# Altium PCB seeeduino nano.PcbDoc
Units mil, origin at the board's own origin, x right, y up, seen from the top; angles counter-clockwise.
Board outline 700 x 1700 mil, 6 copper layers (Top, Route2, Route3, Route14, Route15, Bottom), stack 20.956 mil thick; 53 components, 52 nets, 213 pads, 74 vias.
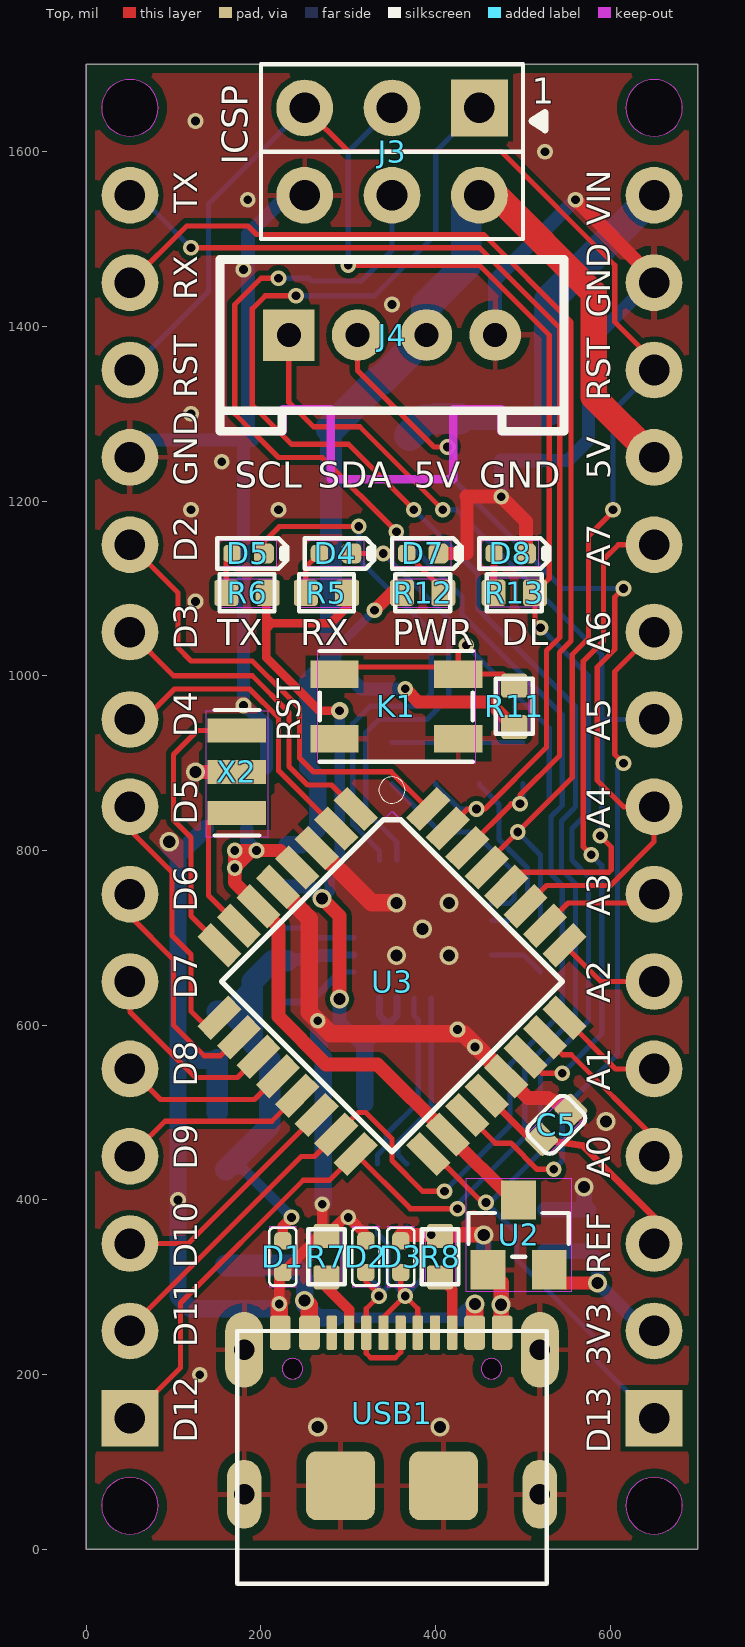
[diagram p0: Top view]
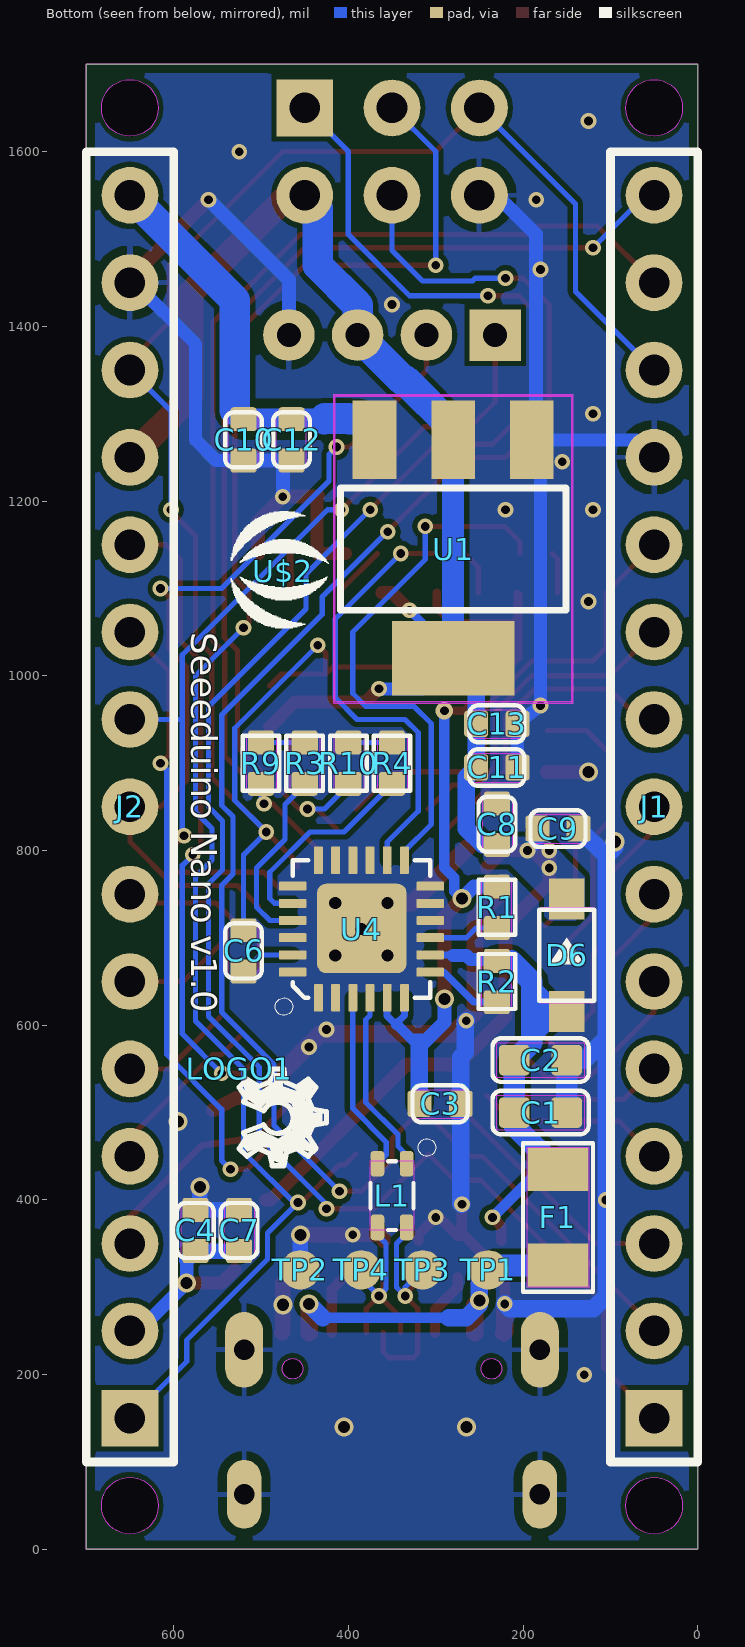
[diagram p1: Bottom view, seen from below]
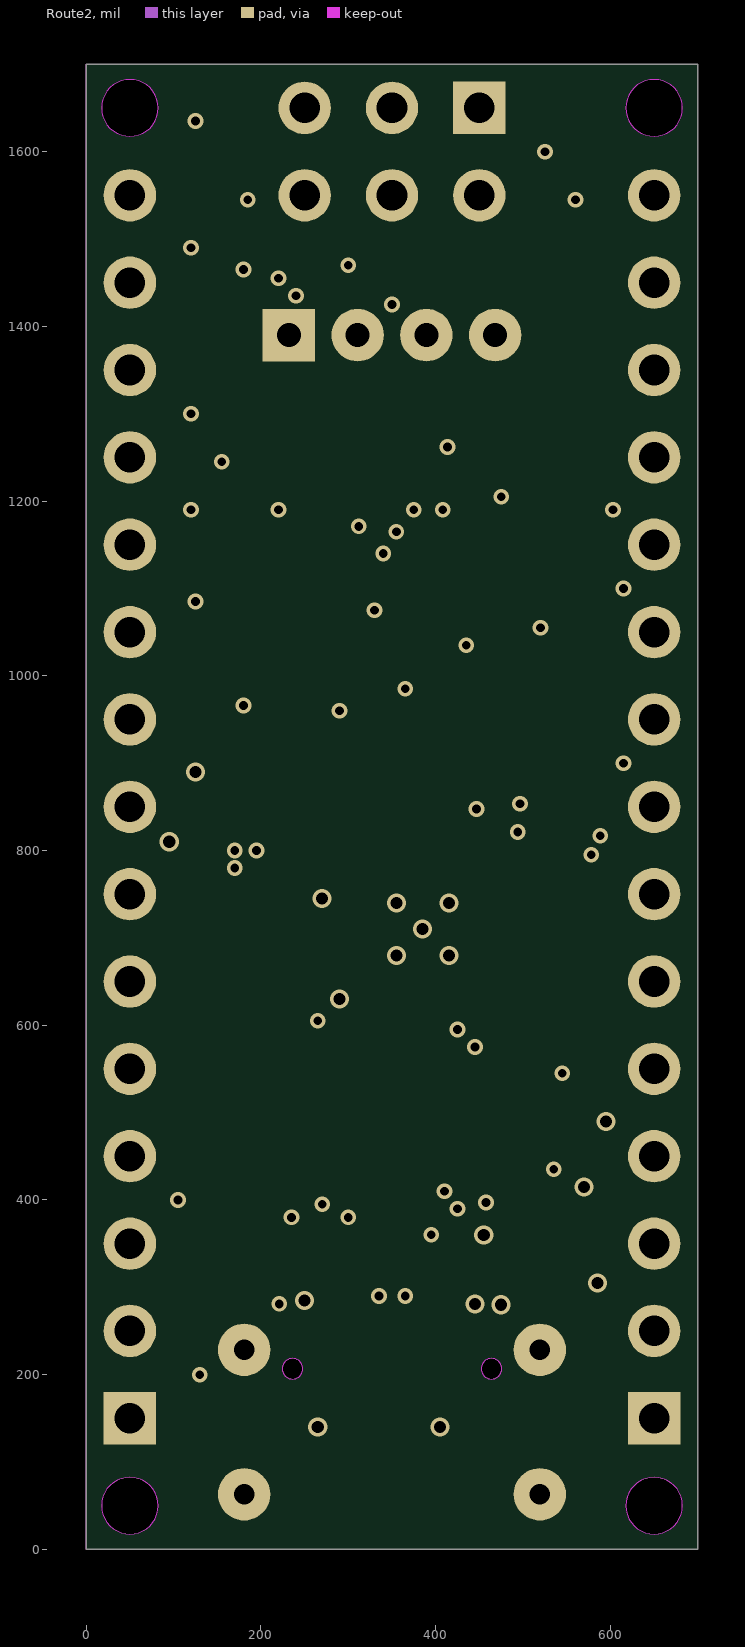
[diagram p2: Route2]
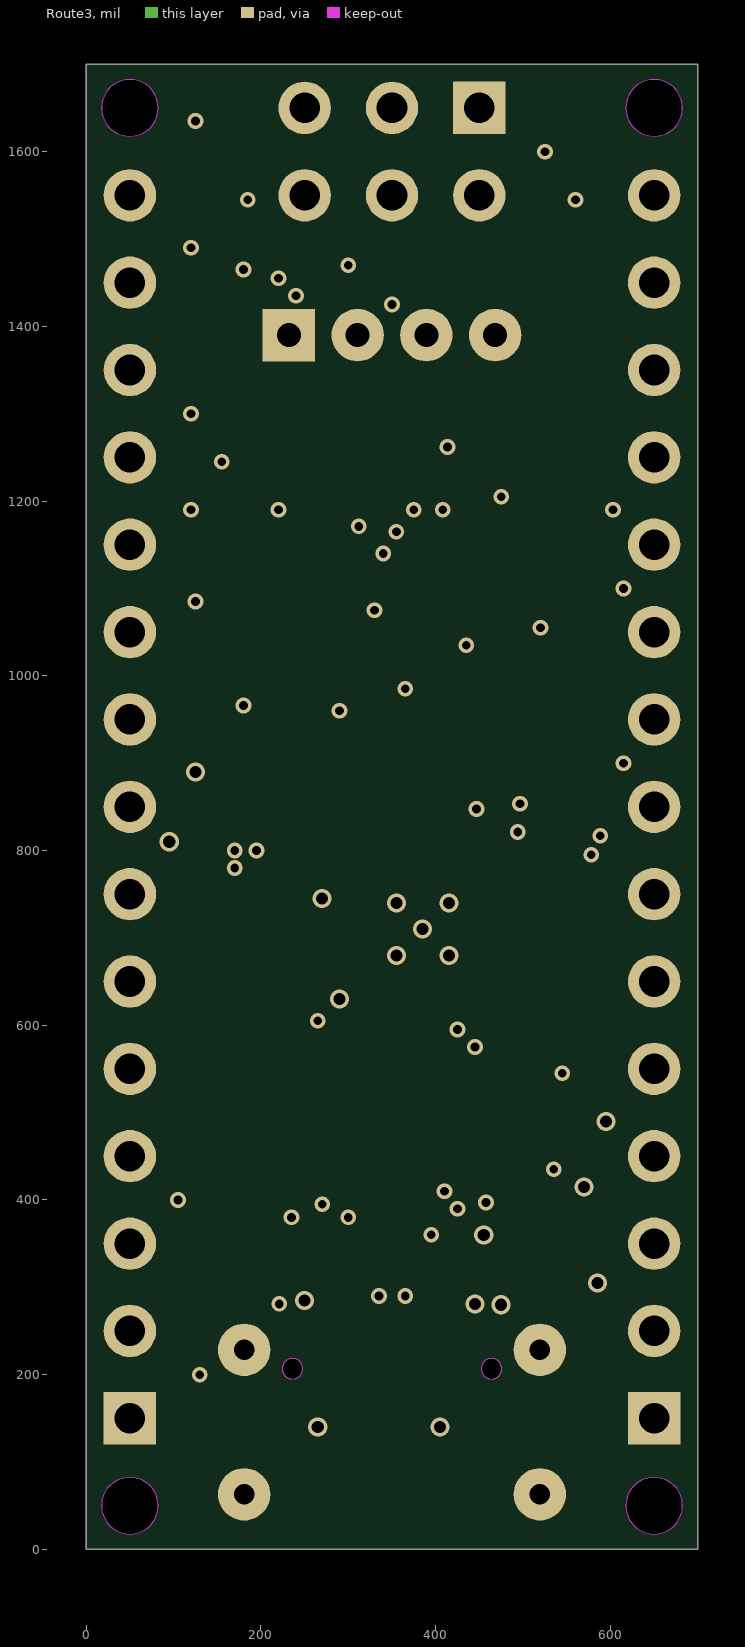
[diagram p3: Route3]
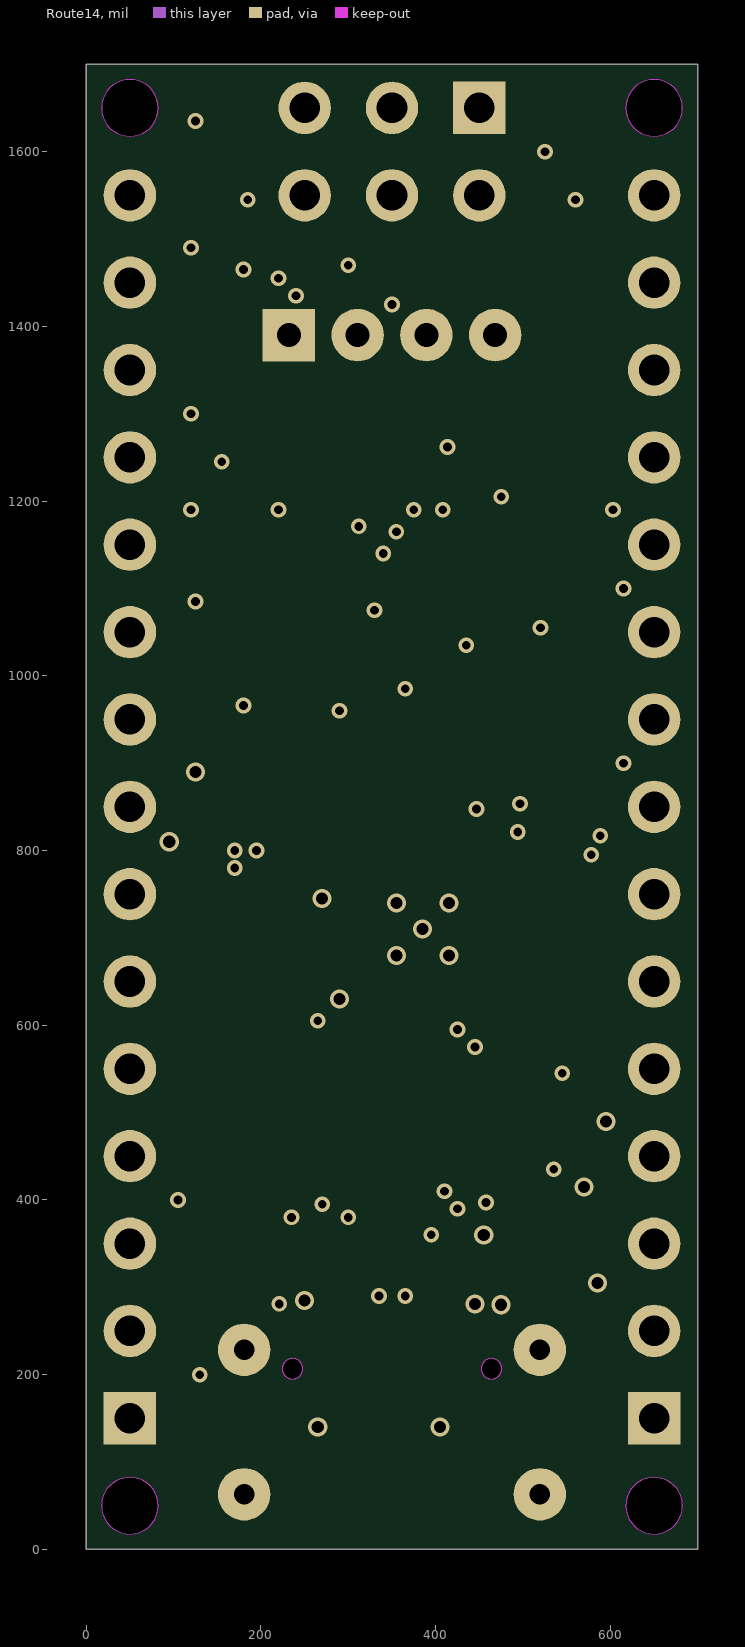
[diagram p4: Route14]
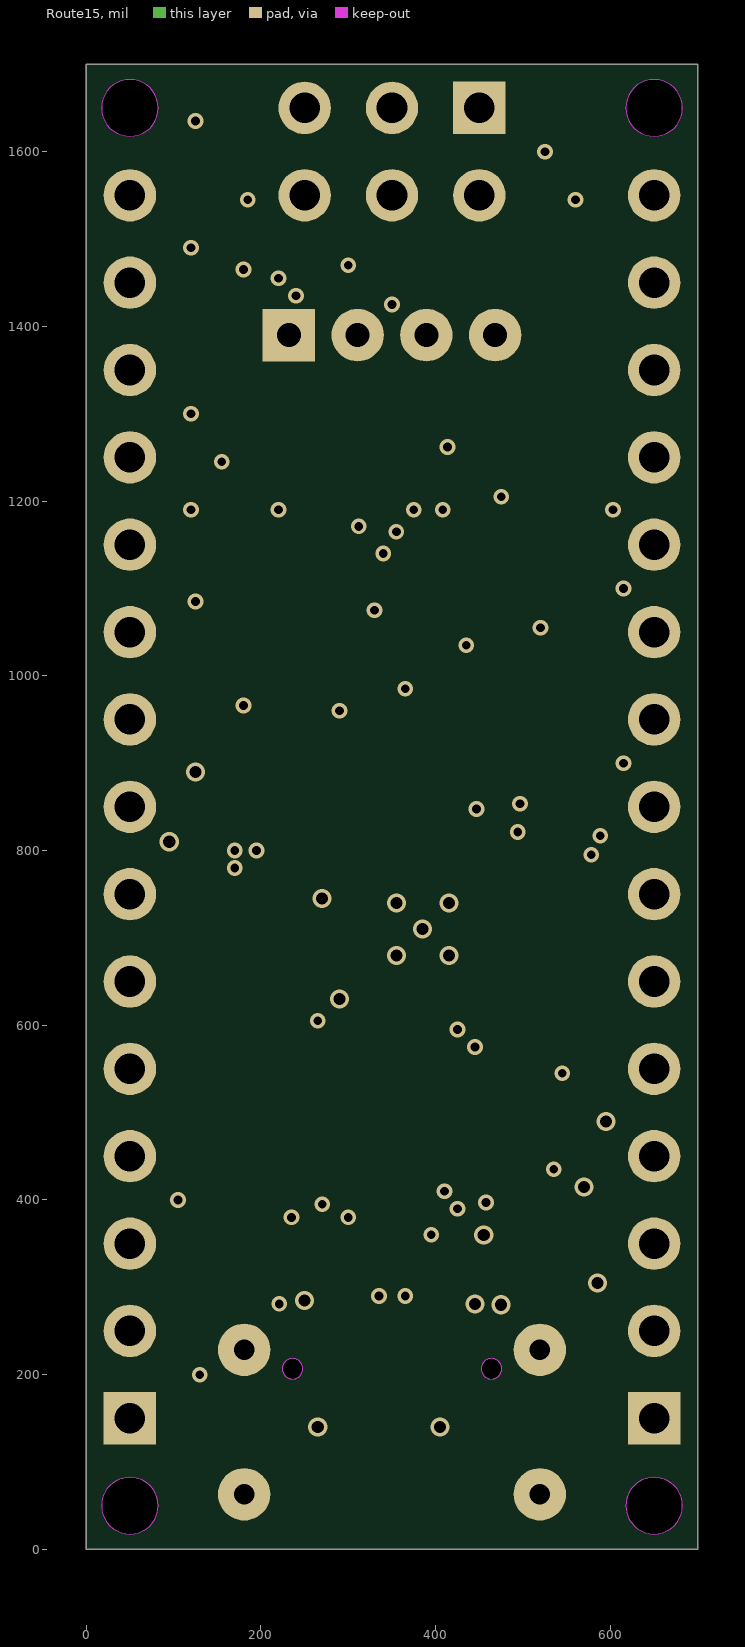
[diagram p5: Route15]

## Layer stack, top to bottom
Top Solder: solder mask 0.4, Solder Resist, Dk 3.5
Top: signal copper 1.378
Dielectric 1: dielectric 12.6, FR-4, Dk 4.8
Route2: signal copper 1.4
Route3: signal copper 1.4
Route14: signal copper 1.4
Route15: signal copper 1.4
Bottom: signal copper 1.378
Bottom Solder: solder mask 0.4, Solder Resist, Dk 3.5

## Board outline
0,1700 0,0 700,0 700,1700
cut-out: 650,1617.5 ccw(c650,1650) 682.5,1650 ccw(c650,1650) 650,1682.5 ccw(c650,1650) 617.5,1650 ccw(c650,1650)
cut-out: 50,1617.5 ccw(c50,1650) 82.5,1650 ccw(c50,1650) 50,1682.5 ccw(c50,1650) 17.5,1650 ccw(c50,1650)
cut-out: 50,17.5 ccw(c50,50) 82.5,50 ccw(c50,50) 50,82.5 ccw(c50,50) 17.5,50 ccw(c50,50)
cut-out: 650,17.5 ccw(c650,50) 682.5,50 ccw(c650,50) 650,82.5 ccw(c650,50) 617.5,50 ccw(c650,50)
cut-out: 236.22,194.88 ccw(c236.22,206.69) 248.03,206.69 ccw(c236.22,206.69) 236.22,218.5 ccw(c236.22,206.69) 224.41,206.69 ccw(c236.22,206.69)
cut-out: 463.78,194.88 ccw(c463.78,206.69) 475.59,206.69 ccw(c463.78,206.69) 463.78,218.5 ccw(c463.78,206.69) 451.97,206.69 ccw(c463.78,206.69)

## Design rules (kind name [scope] priority, off if disabled: settings)
BoardOutlineClearance mdCopperDimension [All] p1: gap=10 ignorepadtopadclearanceinfootprint=FALSE except(0: Arc-SplitContinuation Track-SplitContinuation SMDPad-SplitContinuation THPad-SplitContinuation Via-SplitContinuation Fill-SplitContinuation Poly-SplitContinuation Region-SplitContinuation Text-SplitContinuation)
Clearance "Clearance (Same Net)" [All] p1: gap=6 ignorepadtopadclearanceinfootprint=FALSE
Clearance [All] p2: gap=6 ignorepadtopadclearanceinfootprint=FALSE
HoleSize [All] p1: absolutevalues=TRUE maxlimit=100000 minlimit=10 maxpercent=80.000 minpercent=20.000
HoleToHoleClearance mdDrill [All] p1: gap=10 allowstackedmicrovias=TRUE
MinimumSolderMaskSliver [All] p1 off: minsoldermaskwidth=10
PasteMaskExpansion Expansion_SMDPaste_OFF [InPadClass('SMDPaste_OFF')] p1: expansion=0
PasteMaskExpansion mlMinCreamFrame [All] p2: expansion=0
PolygonConnect PolygonConnect_For_PolygonThermal_ON_Width60000_Gap100000 [InPolygonClass('PolygonThermal_ON_Width60000_Gap100000') vs Not IsVia] p1: connectstyle=Relief reliefconductorwidth=6 reliefentries=4 polygonreliefangle="90 Angle" airgapwidth=10
PolygonConnect PolygonConnect_For_PolygonThermal_OFF [InPolygonClass('PolygonThermal_OFF')] p2: connectstyle=Direct reliefconductorwidth=10 reliefentries=4 polygonreliefangle="90 Angle" airgapwidth=10
PolygonConnect ThermalVias [IsVia] p3: connectstyle=Direct reliefconductorwidth=10 reliefentries=4 polygonreliefangle="90 Angle" airgapwidth=10
PolygonConnect [All] p4: connectstyle=Relief reliefconductorwidth=10 reliefentries=4 polygonreliefangle="90 Angle" airgapwidth=10
RoutingVias [All] p1: holewidth=10 width=18 viastyle="Through Hole" minholewidth=10 minwidth=18 maxholewidth=100 maxwidth=100
SolderMaskExpansion mlMinStopFrame [All] p1: expansion=2
Width [All] p1: maxlimit=10000 minlimit=1 preferedwidth=1
26 further rules are at their usual default settings.

## Classes and differential pairs
polygon class PolygonThermal_ON_Width60000_Gap100000: Polygon_1_Net_GND Polygon_2_Net_GND
polygon class PolygonThermal_OFF: Polygon_1_Net_VCC
pad class SMDPaste_OFF: TP1-T TP2-T TP3-T TP4-T

## Components (designator, comment, footprint, x,y, rotation, side; value= is the part's Value field where it differs from the comment)
C1 "10uF" C0603#1 180,500 r180 bottom
C2 "100nF" C0603#1 180,560 r180 bottom
C3 "100nF" C0603#2 295,510 r0 bottom
C4 "1uF" C0603#2 575,365 r270 bottom
C5 "100nF" C0603#2 538,486 r225 top
C6 "100nF" C0603#2 520,685 r90 bottom
C7 "100nF" C0603#2 525,365 r270 bottom
C8 "100nF" C0603#2 230,830 r270 bottom
C9 "100nF" C0603#2 160,825 r0 bottom
C10 "1uF" C0603#2 520,1270 r90 bottom
C11 "1uF" C0603#2 230,895 r0 bottom
C12 "100nF" C0603#2 465,1270 r90 bottom
C13 "100nF" C0603#2 230,945 r0 bottom
D1 "ESDPSA0402V05" ESD-0402 225,335 r90 top
D2 "ESDPSA0402V05" ESD-0402 320,335 r270 top
D3 "ESDPSA0402V05" ESD-0402 360,335 r270 top
D4 "RED" LED-0402 285,1140 r180 top
D5 "GREEN" LED-0402 185,1140 r180 top
D6 "MBR0520LT1G" SOD123-2.7X1.6 150,680 r90 bottom
D7 "BLUE" LED-0402 385,1140 r180 top
D8 "Yellow" LED-0402 485,1140 r180 top
F1 "1A" F1206 160,380 r90 bottom
J1 "HEADER" H15-2.54 50,850 r180 bottom
J2 "HEADER" H15-2.54 650,850 r180 bottom
J3 "ISP" H2X3-2.54 350,1600 r270 top
J4 "Grove" HW4-2.0 350,1390 r0 top
K1 "BUTTOM" SW4P-SMD-4.5X3.2X2.5MM 355,965 r0 top
L1 "SRF2012-900YA" INT4-0.85-2X1.25X1.2MM 350,405 r0 bottom
LOGO1 "" OSHW_FILLX100_NOTEXT 525,550 r270 bottom
R1 "1k" R0603 230,735 r180 bottom
R2 "0R" R0603 230,650 r180 bottom
R3 "22R" R0603 450,900 r0 bottom
R4 "22R" R0603 350,900 r0 bottom
R5 "1k" R0603 275,1095 r90 top
R6 "1k" R0603 184,1095 r90 top
R7 "5.1k" R0603 275,335 r0 top
R8 "5.1k" R0603 405,335 r180 top
R9 "1k" R0603 500,900 r0 bottom
R10 "1k" R0603 400,900 r0 bottom
R11 "10k" R0603 490,965 r0 top
R12 "3.3k" R0603 385,1095 r90 top
R13 "1k" R0603 490,1095 r270 top
TP1 "" TP-D45MIL 240,320 r90 bottom
TP2 "" TP-D45MIL 455,320 r90 bottom
TP3 "" TP-D45MIL 315,320 r90 bottom
TP4 "" TP-D45MIL 385,320 r90 bottom
U1 "CJ1117B-5.0" SOT-223 280,1145 r0 bottom
U2 "XC6206P332MR" SOT-23 495,360 r0 top
U3 "ATMEGA328P-AU" TQFP32-0.8-7X7MM 350,650 r315 top
U4 "CP2102" QFN24G-0.5-4X4MM 385,710 r180 bottom
U$2 "" SEEED-SILK--TNAME-160*153MIL 475,1120 r270 bottom
USB1 "TYPE-C" USB2.0-TYPE-C 350,250 r90 top
X2 "16MHz" RESONATOR3-SMD-3.6X1.3X0.8MM 172.5,890 r90 top

## Footprints (in the part's own frame and the unit in brackets; to place one, negate y for a bottom-side part, rotate by r counter-clockwise, add the part's x,y. Pads: shape width x height; smd on the part's side, far side on the other; paste and mask are expansions set on the pad)
C0603#1 [mil] "C0603"
  rrect25% 35x35 smd: 1(-30,0) 2(30,0)
  Top keep-out region: -50,-20 -50,20 50,20 50,-20
  silkscreen extent -55,-25 55,25
C0603#2 [mil] "C0603"
  rrect25% 27.4x30 smd: 1(23.7,0) 2(-23.7,0)
  Top keep-out region: -31.65,17.36 32.09,17.36 32.09,-16.3 -31.65,-16.3
  silkscreen extent -32,-21 32,21
ESD-0402 [mil] "ESD-0402"
  rrect50% 19.69x19.69 smd: 1(-18.21,0) 2(18.21,0)
  Top keep-out region: -35,-15 -35,15 35,15 35,-15
  silkscreen extent -33,-16 33,16
F1206 [mil] "F1206"
  rect 50x70 smd: 1(-55,0) 2(55,0)
  Top keep-out region: -80,-35 -80,35 80,35 80,-35
  silkscreen extent -85,-40 85,40
H2X3-2.54 [mil] "H2X3-2.54"
  rect 65x65 / inner rect 60x60 / far side rect 65x65 hole 35: 1(-50,100)
  round 65 / inner round 60 / far side round 65 hole 35: 2(-50,0) 3(-50,-100) 4(50,-100) 5(50,0) 6(50,100)
  Top keep-out region: -100,-150 -100,150 100,150 100,-150
  Top keep-out lines w0: 100,-150 -100,-150 -100,150 100,150 100,-150
  silkscreen extent -100,-150 100,150
H15-2.54 [mil] "H15-2.54"
  rect 65x65 / inner rect 60x60 / far side rect 65x65 hole 35: 1(0,-700)
  round 65 / inner round 60 / far side round 65 hole 35: 2(0,-600) 3(0,-500) 4(0,-400) 5(0,-300) 6(0,-200) 7(0,-100) 8(0,0) 9(0,100) 10(0,200) 11(0,300) 12(0,400) 13(0,500) 14(0,600) 15(0,700)
  Top keep-out region: 50,-750 -50,-750 -50,750 50,750
  silkscreen extent -50,-750 50,750
HW4-2.0 [mm] "HW4-2.0"
  rect 1.5x1.5 / inner rect 1.524x1.524 / far side rect 1.5x1.5 hole 0.7: 1(-3,0)
  round 1.5 / inner round 1.524 / far side round 1.5 hole 0.7: 2(-1,0) 3(1,0) 4(3,0)
  Top keep-out lines w0.254: -5,-2.8 -5,2.2 5,2.2 5,-2.8 ; -4.953,-2.794 -3.175,-2.794 -3.175,-2.159 -1.778,-2.159 -1.778,-4.191 1.778,-4.191 1.778,-2.159 3.175,-2.159 3.175,-2.794 4.953,-2.794
  silkscreen extent -5,-2.8 5,2.2
INT4-0.85-2X1.25X1.2MM [mil] "INT4-0.85-2X1.25X1.2MM"
  rrect50% 15.75x29.53 smd: 1(-16.73,-36.42) 2(-16.73,36.42) 3(16.73,36.42) 4(16.73,-36.42)
  Top keep-out region: 25,-40 -25,-40 -25,40 25,40
  silkscreen extent -50,-65 25,39
LED-0402 [mil] "LED-0402"
  rrect50% 19.69x19.69 smd: +(18.21,0)
  rrect50% 22.83x22.83 smd: -(-18.41,0)
  Top keep-out region: -32.5,-15 -32.5,15 32.5,15 32.5,-15
  silkscreen extent -45,-18 35,18
OSHW_FILLX100_NOTEXT [mil] "OSHW_FILLX100_NOTEXT"
  silkscreen extent 0,0 111,100
QFN24G-0.5-4X4MM [mil] "QFN24G-0.5-4X4MM"
  rrect20% 10.24x31.5 smd: 1(-49.21,-78.74) 2(-29.53,-78.74) 3(-9.84,-78.74) 4(9.84,-78.74) 5(29.53,-78.74) 6(49.21,-78.74) 13(49.21,78.74) 14(29.53,78.74) 15(9.84,78.74) 16(-9.84,78.74) 17(-29.53,78.74) 18(-49.21,78.74)
  rrect20% 31.5x10.24 smd: 7(78.74,-49.21) 8(78.74,-29.53) 9(78.74,-9.84) 10(78.74,9.84) 11(78.74,29.53) 12(78.74,49.21) 19(-78.74,49.21) 20(-78.74,29.53) 21(-78.74,9.84) 22(-78.74,-9.84) 23(-78.74,-29.53) 24(-78.74,-49.21)
  rrect20% 102.36x102.36 smd: PAD(0.39,0.79)
  silkscreen extent -99,-99 79,79
R0603 [mil] "R0603"
  rrect25% 30x27.4 smd: 1(0,23.7) 2(0,-23.7)
  Top keep-out region: -17.36,-31.65 -17.36,32.09 16.3,32.09 16.3,-31.65
  silkscreen extent -21,-32 21,32
RESONATOR3-SMD-3.6X1.3X0.8MM [mil] "RESONATOR3-SMD-3.6X1.3X0.8MM"
  rect 27.56x66.93 smd: 1(-47.24,0) 2(0,0) 3(47.24,0)
  Top keep-out region: -75,-35 -75,35 70,35 70,-35
  silkscreen extent -73,-26 71,26
SEEED-SILK--TNAME-160*153MIL [mil] "SEEED-SILK--TNAME-160*153MIL"
  silkscreen extent -68,-60 66,52
SOD123-2.7X1.6 [mm] "SOD123-2.7X1.6"
  rect 1.2x1.02 smd: 1(-1.635,0) 2(1.635,0)
  Top keep-out region: 1.397,0.762 1.397,-0.762 -1.397,-0.762 -1.397,0.762
  silkscreen extent -1.33,-0.8 1.33,0.8
SOT-23 [mil] "SOT-23"
  rect 40x45 smd: 1(-35,-40) 2(35,-40) 3(0,40)
  Top keep-out region: -60,-65 -60,65 60,65 60,-65
  silkscreen extent -58,-25 58,25
SOT-223 [mil] "SOT-223"
  rect 50x90 smd: 1(-90,-125) 2(0,-125) 3(90,-125)
  rect 140x85 smd: TER(0,125)
  Top keep-out region: -135,-175 -135,175 135,175 135,-175
  Top keep-out lines w2: -136.73,176.5 -136.73,-176.5 136.73,-176.5 136.73,176.5 -136.73,176.5
  silkscreen extent -129,-70 129,70
SW4P-SMD-4.5X3.2X2.5MM [mil] "SW4P-SMD-4.5X3.2X2.5MM"
  rect 55.12x31.5 smd: 1(-70.87,-37.01) 2(70.87,-37.01) 3(70.87,37.01) 4(-70.87,37.01)
  Top keep-out region: -90,-65 -90,65 90,65 90,-65
  silkscreen extent -88,-63 88,63
TP-D45MIL [mil] "TP-D45MIL"
  rrect100% 45x45 smd paste-22.5: T(0,0)
TQFP32-0.8-7X7MM [mil] "TQFP32-0.8-7X7MM"
  rect 50x22 smd: 1(-169,110.24) 2(-169,78.74) 3(-169,47.24) 4(-169,15.75) 5(-169,-15.75) 6(-169,-47.24) 7(-169,-78.74) 8(-169,-110.24) 17(169,-110.24) 18(169,-78.74) 19(169,-47.24) 20(169,-15.75) 21(169,15.75) 22(169,47.24) 23(169,78.74) 24(169,110.24)
  rect 22x50 smd: 9(-110.24,-169) 10(-78.74,-169) 11(-47.24,-169) 12(-15.75,-169) 13(15.75,-169) 14(47.24,-169) 15(78.74,-169) 16(110.24,-169) 25(110.24,169) 26(78.74,169) 27(47.24,169) 28(15.75,169) 29(-15.75,169) 30(-47.24,169) 31(-78.74,169) 32(-110.24,169)
  Top keep-out region: -137.99,-137.99 -137.99,137.99 137.99,137.99 137.99,-137.99
  silkscreen extent -170,-138 138,170
USB2.0-TYPE-C [mm] "USB2.0-TYPE-C"
  rrect30% 1x0.6 smd: A1_B12(-0.05,3.25) A4_B9(-0.05,2.4) B1_A12(-0.05,-3.2) B4_A9(-0.05,-2.4)
  rrect30% 1x0.3 smd: A5(-0.05,1.25) A6(-0.05,0.25) A7(-0.05,-0.25) A8(-0.05,-1.25) B5(-0.05,-1.75) B6(-0.05,-0.75) B7(-0.05,0.75) B8(-0.05,1.75)
  oval 2x1 / inner round 1.524 / far side oval 2x1 hole 0.6: S1(-4.75,4.3) S2(-4.75,-4.3)
  oval 2.2x1.1 / inner round 1.524 / far side oval 2.2x1.1 hole 0.6: S3(-0.55,4.3) S4(-0.55,-4.3)
  rrect30% 2x2 smd: S5(-4.5,1.5) S6(-4.5,-1.5)
  Route2 pour cut-out: 0.064,-3.746 -1.143,-3.746 -1.337,-3.785 -1.502,-3.895 -1.612,-4.06 -1.651,-4.255 -1.651,-4.255 -1.607,-4.473 -1.484,-4.659 -1.298,-4.782 -1.079,-4.826 -1.079,-4.826 0,-4.826 0.219,-4.782 0.404,-4.659 0.528,-4.473 0.572,-4.255 0.572,-4.255 0.533,-4.06 0.423,-3.895 0.258,-3.785 0.064,-3.746 0.064,-3.746
  Route2 pour cut-out: 0.063,4.826 -1.143,4.826 -1.337,4.787 -1.502,4.677 -1.612,4.512 -1.651,4.318 -1.651,4.318 -1.607,4.099 -1.484,3.914 -1.298,3.79 -1.08,3.746 -1.08,3.746 0,3.746 0.219,3.79 0.404,3.914 0.528,4.099 0.571,4.318 0.571,4.318 0.533,4.512 0.423,4.677 0.258,4.787 0.063,4.826 0.063,4.826
  Route2 pour cut-out: -4.763,-3.81 -5.271,-3.81 -5.465,-3.849 -5.63,-3.959 -5.74,-4.124 -5.779,-4.318 -5.779,-4.318 -5.74,-4.512 -5.63,-4.677 -5.465,-4.787 -5.271,-4.826 -5.271,-4.826 -4.763,-4.826 -4.255,-4.826 -4.06,-4.787 -3.895,-4.677 -3.785,-4.512 -3.746,-4.318 -3.746,-4.318 -3.785,-4.124 -3.895,-3.959 -4.06,-3.849 -4.255,-3.81 -4.255,-3.81 -4.763,-3.81
  Route2 pour cut-out: -4.763,4.826 -5.271,4.826 -5.465,4.787 -5.63,4.677 -5.74,4.512 -5.779,4.318 -5.779,4.318 -5.74,4.124 -5.63,3.959 -5.465,3.849 -5.271,3.81 -5.271,3.81 -4.763,3.81 -4.255,3.81 -4.06,3.849 -3.895,3.959 -3.785,4.124 -3.746,4.318 -3.746,4.318 -3.785,4.512 -3.895,4.677 -4.06,4.787 -4.255,4.826 -4.255,4.826 -4.763,4.826
  Route3 pour cut-out: 0.064,-3.746 -1.143,-3.746 -1.337,-3.785 -1.502,-3.895 -1.612,-4.06 -1.651,-4.255 -1.651,-4.255 -1.607,-4.473 -1.484,-4.659 -1.298,-4.782 -1.079,-4.826 -1.079,-4.826 0,-4.826 0.219,-4.782 0.404,-4.659 0.528,-4.473 0.572,-4.255 0.572,-4.255 0.533,-4.06 0.423,-3.895 0.258,-3.785 0.064,-3.746 0.064,-3.746
  Route3 pour cut-out: 0.063,4.826 -1.143,4.826 -1.337,4.787 -1.502,4.677 -1.612,4.512 -1.651,4.318 -1.651,4.318 -1.607,4.099 -1.484,3.914 -1.298,3.79 -1.08,3.746 -1.08,3.746 0,3.746 0.219,3.79 0.404,3.914 0.528,4.099 0.571,4.318 0.571,4.318 0.533,4.512 0.423,4.677 0.258,4.787 0.063,4.826 0.063,4.826
  Route3 pour cut-out: -4.255,-3.81 -5.271,-3.81 -5.465,-3.849 -5.63,-3.959 -5.74,-4.124 -5.779,-4.318 -5.779,-4.318 -5.74,-4.512 -5.63,-4.677 -5.465,-4.787 -5.271,-4.826 -5.271,-4.826 -4.255,-4.826 -4.06,-4.787 -3.895,-4.677 -3.785,-4.512 -3.746,-4.318 -3.746,-4.318 -3.785,-4.124 -3.895,-3.959 -4.06,-3.849 -4.255,-3.81 -4.255,-3.81
  Route3 pour cut-out: -4.255,4.826 -5.271,4.826 -5.465,4.787 -5.63,4.677 -5.74,4.512 -5.779,4.318 -5.779,4.318 -5.74,4.124 -5.63,3.959 -5.465,3.849 -5.271,3.81 -5.271,3.81 -4.255,3.81 -4.06,3.849 -3.895,3.959 -3.785,4.124 -3.746,4.318 -3.746,4.318 -3.785,4.512 -3.895,4.677 -4.06,4.787 -4.255,4.826 -4.255,4.826
  Route14 pour cut-out: 0.064,-3.746 -1.143,-3.746 -1.337,-3.785 -1.502,-3.895 -1.612,-4.06 -1.651,-4.255 -1.651,-4.255 -1.607,-4.473 -1.484,-4.659 -1.298,-4.782 -1.079,-4.826 -1.079,-4.826 0,-4.826 0.219,-4.782 0.404,-4.659 0.528,-4.473 0.572,-4.255 0.572,-4.255 0.533,-4.06 0.423,-3.895 0.258,-3.785 0.064,-3.746 0.064,-3.746
  Route14 pour cut-out: 0.063,4.826 -1.143,4.826 -1.337,4.787 -1.502,4.677 -1.612,4.512 -1.651,4.318 -1.651,4.318 -1.607,4.099 -1.484,3.914 -1.298,3.79 -1.08,3.746 -1.08,3.746 0,3.746 0.219,3.79 0.404,3.914 0.528,4.099 0.571,4.318 0.571,4.318 0.533,4.512 0.423,4.677 0.258,4.787 0.063,4.826 0.063,4.826
  Route14 pour cut-out: -4.255,-3.81 -5.271,-3.81 -5.465,-3.849 -5.63,-3.959 -5.74,-4.124 -5.779,-4.318 -5.779,-4.318 -5.74,-4.512 -5.63,-4.677 -5.465,-4.787 -5.271,-4.826 -5.271,-4.826 -4.255,-4.826 -4.06,-4.787 -3.895,-4.677 -3.785,-4.512 -3.746,-4.318 -3.746,-4.318 -3.785,-4.124 -3.895,-3.959 -4.06,-3.849 -4.255,-3.81 -4.255,-3.81
  Route14 pour cut-out: -4.255,4.826 -5.271,4.826 -5.465,4.787 -5.63,4.677 -5.74,4.512 -5.779,4.318 -5.779,4.318 -5.74,4.124 -5.63,3.959 -5.465,3.849 -5.271,3.81 -5.271,3.81 -4.255,3.81 -4.06,3.849 -3.895,3.959 -3.785,4.124 -3.746,4.318 -3.746,4.318 -3.785,4.512 -3.895,4.677 -4.06,4.787 -4.255,4.826 -4.255,4.826
  Route15 pour cut-out: -0.571,-3.746 -1.143,-3.746 -1.337,-3.785 -1.502,-3.895 -1.612,-4.06 -1.651,-4.255 -1.651,-4.255 -1.607,-4.473 -1.484,-4.659 -1.298,-4.782 -1.079,-4.826 -1.079,-4.826 -0.571,-4.826 0,-4.826 0.219,-4.782 0.404,-4.659 0.528,-4.473 0.572,-4.255 0.572,-4.255 0.533,-4.06 0.423,-3.895 0.258,-3.785 0.064,-3.746 0.064,-3.746 -0.571,-3.746
  Route15 pour cut-out: -0.572,4.826 -1.143,4.826 -1.337,4.787 -1.502,4.677 -1.612,4.512 -1.651,4.318 -1.651,4.318 -1.607,4.099 -1.484,3.914 -1.298,3.79 -1.08,3.746 -1.08,3.746 -0.572,3.746 0,3.746 0.219,3.79 0.404,3.914 0.528,4.099 0.571,4.318 0.571,4.318 0.533,4.512 0.423,4.677 0.258,4.787 0.063,4.826 0.063,4.826 -0.572,4.826
  Route15 pour cut-out: -4.255,-3.81 -5.271,-3.81 -5.465,-3.849 -5.63,-3.959 -5.74,-4.124 -5.779,-4.318 -5.779,-4.318 -5.74,-4.512 -5.63,-4.677 -5.465,-4.787 -5.271,-4.826 -5.271,-4.826 -4.255,-4.826 -4.06,-4.787 -3.895,-4.677 -3.785,-4.512 -3.746,-4.318 -3.746,-4.318 -3.785,-4.124 -3.895,-3.959 -4.06,-3.849 -4.255,-3.81 -4.255,-3.81
  Route15 pour cut-out: -4.255,4.826 -5.271,4.826 -5.465,4.787 -5.63,4.677 -5.74,4.512 -5.779,4.318 -5.779,4.318 -5.74,4.124 -5.63,3.959 -5.465,3.849 -5.271,3.81 -5.271,3.81 -4.255,3.81 -4.06,3.849 -3.895,3.959 -3.785,4.124 -3.746,4.318 -3.746,4.318 -3.785,4.512 -3.895,4.677 -4.06,4.787 -4.255,4.826 -4.255,4.826
  silkscreen extent -7.35,-4.5 0,4.5

## Part data
C1 C2 C3 C4 C5 C6 C7 C8 C9 C10 C11 C12 C13: library part C0603, PackageName=C0603, OriginalSource=Eagle
D1 D2 D3: library part ESD-0402, PackageName=ESD-0402, OriginalSource=Eagle
D4 D5 D7 D8: library part LED-0402, PackageName=LED-0402, OriginalSource=Eagle
D6: library part SOD123-2.7X1.6, PackageName=SOD123-2.7X1.6, OriginalSource=Eagle
F1: library part F1206, PackageName=F1206, OriginalSource=Eagle
J1 J2: library part H15-2.54, PackageName=H15-2.54, OriginalSource=Eagle
J3: library part H2X3-2.54, PackageName=H2X3-2.54, OriginalSource=Eagle
J4: library part HW4-2.0, PackageName=HW4-2.0, OriginalSource=Eagle
K1: library part SW4P-SMD-4.5X3.2X2.5MM, PackageName=SW4P-SMD-4.5X3.2X2.5MM, OriginalSource=Eagle
L1: library part INT4-0.85-2X1.25X1.2MM, PackageName=INT4-0.85-2X1.25X1.2MM, OriginalSource=Eagle
LOGO1: library part OSHW_FILLX100_NOTEXT, PackageName=OSHW_FILLX100_NOTEXT, OriginalSource=Eagle
R1 R2 R3 R4 R5 R6 R7 R8 R9 R10 R11 R12 R13: library part R0603, PackageName=R0603, OriginalSource=Eagle
TP1 TP2 TP3 TP4: library part TP-D45MIL, PackageName=TP-D45MIL, OriginalSource=Eagle
U1: library part SOT-223, PackageName=SOT-223, OriginalSource=Eagle
U2: library part SOT-23, PackageName=SOT-23, OriginalSource=Eagle
U3: library part TQFP32-0.8-7X7MM, PackageName=TQFP32-0.8-7X7MM, OriginalSource=Eagle
U4: library part QFN24G-0.5-4X4MM, PackageName=QFN24G-0.5-4X4MM, OriginalSource=Eagle
U$2: library part SEEED-SILK--TNAME-160*153MIL, PackageName=SEEED-SILK--TNAME-160*153MIL, OriginalSource=Eagle
USB1: library part USB2.0-TYPE-C, PackageName=USB2.0-TYPE-C, OriginalSource=Eagle
X2: library part RESONATOR3-SMD-3.6X1.3X0.8MM, PackageName=RESONATOR3-SMD-3.6X1.3X0.8MM, OriginalSource=Eagle

## Free pads (board coordinates)
  round 65 hole 65 unplated: MH1(50,50) MH2(650,50) MH3(650,1650) MH4(50,1650)
  round 23.62 hole 23.62 unplated: MH1(463.78,206.69) MH2(236.22,206.69)

## Via types
v1: diameter 18/18/18/18/18/18 (per signal layer), hole 10, Top to Bottom, tented both sides, 55 vias
v2: diameter 21.78/21.78/21.78/21.78/21.78/21.78 (per signal layer), hole 13.78, Top to Bottom, tented both sides, 18 vias
v3: diameter 20/18/18/18/18/20 (per signal layer), hole 10, Top to Bottom, tented both sides, 1 vias

## Nets (pads, with @x,y where several pads share a name; then routed paths per layer and width w, separated by ;. In a path a pad name is that pad's centre, name@x,y a point inside that pad or via, vN(x,y) a via of type N, cw(c..) or ccw(c..) an arc to the next point about the centre after c; other vN are vias at no path point)
3V3: C4.1 C7.1 J2.2 U2.2 | length 239.4
  Top w15: U2.2 545,305 v2(585,305)
  Bottom w15: C4.1@585,331.3 v2(585,305) 640,250 J2.2
  Bottom w18: C7.1 C4.1 C4.1@585,331.3
A0: J2.4 U3.23 | length 193.7
  Top w6: U3.23 545.18,566.18 555.18,566.18 650,471.36 J2.4
A1: J2.5 U3.24 | length 126.8
  Top w6: U3.24@547.45,608.45 605.9,550 J2.5
A2: J2.6 U3.25 | length 119.8
  Top w6: U3.25@547.45,691.55 589,650 J2.6
A3: J2.7 U3.26 | length 139.8
  Top w6: U3.26 551.36,740 640,740 J2.7
A4/SDA: J2.8 J4.2 U3.27 | length 993.7
  Top w6: J4.2 310.63,1349.37 398,1262 v1(413.46,1262) ; U3.27 526.81,760 600,760 650,810 J2.8 615,850 585,880 585,1010 605,1030 605,1090 v1(615,1100)
  Bottom w6: v1(413.46,1262) 422,1253.46 422,1223 545,1100 v1(615,1100)
A5/SCL: J2.9 J4.1 U3.28 | length 996.3
  Top w6: J4.1 231.89,1313.11 260,1285 313,1285 v1(408,1190) ; U3.28 497.27,775 598.03,775 601,777.97 601,804 v1(588.23,816.77)
  Bottom w6: v1(408,1190) 424,1190 590,1024 590,950 ; v1(588.23,816.77) 590,816.77 590,950 ; J2.9 590,950
A6: J2.10 U3.19 | length 795.5
  Top w6: U3.19 468.19,465 486.09,465 516.09,435 v1(535,435) ; v1(615,900) 605,910 605,1005 J2.10
  Bottom w6: v1(535,435) 545,445 545,503.69 608,566.69 608,893 v1(615,900)
A7: J2.11 U3.22 | length 739.8
  Top w6: U3.22 521.81,545 v1(545,545) ; v1(578,795) 569,804 569,1017 592,1040 592,1132.91 609.09,1150 J2.11
  Bottom w6: v1(545,545) 590,590 590,783 v1(578,795)
AREF: C5.1 J2.3 U3.20 | length 283.3
  Top w8: U3.20 515.43,462.3 C5.1 568,462.3 650,380.3 J2.3
D0/RXD: J1.14 R9.1 U3.30 | length 1259
  Top w6: J1.14 115,1515 185,1515 195,1505 455,1505 555,1405 555,1040 541.59,1026.59 541.59,908.41 496.59,863.41 v1(496.59,853.41) 486.59,853.41 U3.30
  Bottom w6: v1(496.59,853.41) 500,856.81 R9.1
D1/TXD: J1.15 R10.1 U3.31 | length 1252.1
  Top w6: v1(120,1490) 450,1490 542,1398 542,1044 526.82,1028.82 526.82,918.18 456.24,847.6 v1(446.82,847.6) 436.24,847.6 U3.31
  Bottom w6: J1.15 60,1550 v1(120,1490) ; R10.1 400,875 427.4,847.6 v1(446.82,847.6)
D2: J1.11 U3.32 | length 537.1
  Top w6: J1.11 105,1095 105,1032 120,1017 189.97,1017 228.49,978.49 244,962.97 244,906 260,890 349,890 U3.32@391.55,847.45
D3: J1.10 U3.1 | length 378.5
  Top w6: J1.10 100,1000 190,1000 232,958 232,896.33 253.33,875 280.9,875 U3.1@308.45,847.45
D4: J1.9 U3.2 | length 352.4
  Top w6: J1.9 65.96,950 100.96,985 187.02,985 220,952.02 220,891.36 U3.2
D5: J1.8 U3.9 | length 304.4
  Top w6: J1.8 48.09,848.09 48.09,825 98.09,775 98.09,702.72 120,680.82 120,616 132.55,603.45 147.55,603.45 U3.9@152.55,608.45
D6: J1.7 U3.10 | length 268.8
  Top w6: J1.7 50,725 100,675 100,600 135,565 153.64,565 U3.10
D7: J1.6 U3.11 | length 223.1
  Top w6: J1.6 50,615 125,540 173.19,540 U3.11
D8: J1.5 U3.12 | length 194.9
  Top w6: J1.5 85,515 192.73,515 U3.12
D9: J1.4 U3.13 | length 220.4
  Top w6: J1.4 90,490 212.27,490 U3.13
D10: J1.3 U3.14 | length 274.8
  Top w6: J1.3 116.81,350 U3.14
D11/MOSI: J1.2 J3.5 U3.15 | length 2055.1
  Top w6: J1.2 50,253.64 246.18,449.82 261.18,449.82 311.36,500 320,500 350,470 350,445 385,410 v1(410,410) ; v1(220,1455) 200,1455 170,1425 170,1300 220,1250 270,1250 v1(355,1165)
  Bottom w6: v1(220,1455) 255,1455 258,1452 315,1452 350,1487 J3.5 ; v1(355,1165) 430,1090 430,1070 545,955 545,851.82 532,838.82 532,773 545,760 545,615 485,555 485,485 v1(410,410)
D12/MISO: J1.1 J3.1 U3.16 | length 2271.1
  Top w6: J1.1 107.95,207.95 107.95,282.05 248.45,422.55 278.45,422.55 308.45,452.55 371,390 v1(425,390) ; v1(240,1435) 205,1435 190,1420 190,1310 235,1265 300,1265 v1(375,1190)
  Bottom w6: v1(240,1435) 330,1435 400,1505 400,1600 J3.1 ; v1(375,1190) 448.5,1116.5 448.5,1076.5 560,965 560,850 557,847 557,846.84 544,833.84 544,777.97 560,761.97 560,610 502,552 502,472 425,395 v1(425,390)
D13/SCK: J2.1 J3.2 R13.1 U3.17 | length 1970.5
  Top w6: v1(300,1470) 450,1470 530,1390 530,1111.3 R13.1 513.7,1061.3 v1(520,1055) ; U3.17@391.55,452.55 403.74,440.37 410,440.37 453.31,397.05 v1(457.5,397.05)
  Bottom w6: v1(300,1470) 300,1600 J3.2 ; v1(457.5,397.05) v1@460,394.55 ; v1(520,1055) 575,1000 575,844 556,825 556,789 575,770 575,605 520,550 520,454.55 v1@460,394.55 ; J2.1 585,215 585,239.55 492.5,332.05 492.5,362.05 v1@460,394.55
D+: D3.2 L1.3 TP4.T USB1.A6 USB1.B6 | length 253.6
  Top w6: USB1.A6 340.16,265.63 364.53,290 v1(365,290) ; D3.2 360,295 v1(365,290) ; USB1.B6 379.53,275.47 v1(365,290)
  Bottom w6: L1.3 366.73,359.73 357,350 357,298 v1(365,290) 385,310 TP4.T
D-: D2.2 L1.2 TP3.T USB1.A7 USB1.B7 | length 297.2
  Top w6: D2.2 320,306.79 335,291.79 v1(335,290) 320.47,275.47 USB1.B7 320.47,224.53 325.65,219.35 353.75,219.35 360.06,225.66 360.06,247.81 USB1.A7
  Bottom w6: TP3.T 335,300 v1(335,290) 345,300 345,350 333.27,361.73 L1.2
GND: C1.2 C2.2 C3.2 C4.2 C5.2 C7.2 C8.2 C9.2 C10.2 C11.2 C12.2 C13.2 D1.1 D2.1 D3.1 D7.- D8.- J1.12 J2.14 J3.4 J4.4 K1.1 K1.2 R7.1 R8.2 TP2.T U1.1 U2.1 U3.3 U3.5 U3.21 U4.2 U4.PAD USB1.A1_B12 USB1.B1_A12 USB1.S1 USB1.S2 USB1.S3 USB1.S4 USB1.S5 USB1.S6 X2.2 | length 3999.5
  Top w12: v1(220.98,280.98) 220.98,312.77 266.91,358.7 R7.1 ; v1(270,395) 270,363.7 R7.1 ; v1(300,380) v1@301.3,378.7 ; D2.1 320,360 v1@301.3,378.7 ; R7.1 295,378.7 v1@301.3,378.7
  Top w15: D7.- 435.9,1140 435.9,1204.1 435,1205
  Top w16: v2(125,890) X2.2 ; D3.1 360,360 v1(395,360) ; 435,1205 v1(475,1205) 503.41,1176.59 D8.- ; U3.21 505.64,516.63 528.56,516.63 C5.2 ; v1(560,1545) 650,1455 J2.14
  Top w18: R8.2 406.3,360 v2(455,360) ; U2.1 475,305 v2(475,280) 475,249.02 USB1.B1_A12
  Top w20: U3.5 243.11,734.62 243.11,733.86 255,721.97 255,615 v1(265,605) 280,590 432.27,590 U3.21 ; v1(220.98,280.98) 220.98,249.1 USB1.A1_B12 ; U3.3 326.81,740 v2(355,740)
  Bottom w15: J1.12 70,1270 U1.1@185,1270 ; C11.2 C13.2 v1(180,966.02) 180,1265 U1.1@185,1270 ; C10.2 551.3,1246.3 575,1270 575,1380 645,1450 J2.14 ; U1.1@185,1270 187.5,1272.5 190,1275 U1.1 U1.1@185,1270
  Bottom w16: U1.1 187.5,1272.5 185,1275 185,1505 230,1550 J3.4 ; J4.4 468.11,1453.11 v1(560,1545) ; v1(475,1205) 475,1246.3 C10.2
  Bottom w18: TP2.T v2(455,360) ; C7.2 C4.2 570,393.7 v2(570,415)
  Bottom w20: v2(95,810) 95,803.7 105,793.7 ; C9.2 105,793.7 ; C2.2 130,560 105,585 ; v1(220.98,280.98) 215.28,275.28 119.72,275.28 105,290 v1(105,400) 105,585 ; v1(265,605) 266,604 266,568.76 271.3,563.46 271.3,396.3 v1(270,395) ; 105,585 105,793.7
  Bottom w25: C1.2 C2.2
  other v1: 130,200 445,575 425,595 125,1085 120,1190 220,1190 155,1245 120,1300 350,1425 180,1465 185,1545 525,1600 125,1635
  other v2: 265,140 405,140 595,490 355,680 415,680 385,710 415,740
N$1: R7.2 USB1.A5 | length 74
  Top w12: R7.2 275,300 300.79,274.21 USB1.A5
N$2: R8.1 USB1.B5 | length 69
  Top w12: R8.1 418.9,297.4 USB1.B5
N$3: D8.+ R13.2 | length 45
  Top w8: R13.2 466.74,1139.95 D8.+
N$4: F1.1 TP1.T USB1.A4_B9 USB1.B4_A9 | length 405.9
  Top w12: v2@444.49,280.1 v2(445,280.61)
  Top w20: v2(250,285) 255.51,279.49 USB1.A4_B9 ; USB1.B4_A9 v2@444.49,280.1
  Bottom w12: 285,265 429.39,265
  Bottom w20: TP1.T 250,310 250,295 v2(250,285) 250,280 265,265 285,265 ; 429.39,265 v2(445,280.61)
  Bottom w25: F1.1 235,325 TP1.T
N$5: C6.2 U4.23 | length 64.2
  Bottom w6: U4.23 500.83,680.47 C6.2
N$6: D4.+ R5.1 | length 51.4
  Top w6: R5.1 251.3,1124.51 D4.+
N$7: U3.7 X2.1 | length 170
  Top w6: X2.1 150,842.76 140,832.76 140,748.64 U3.7
N$8: D5.- U4.13 | length 628.2
  Top w6: D5.- 203.41,1153.41 221,1171 v1(312,1171)
  Bottom w6: v1(312,1171) 312,1133 395,1050 395,980 380,965 325,965 305,945 305,830 335.79,799.21 U4.13
N$9: U3.8 X2.3 | length 324
  Top w6: U3.8@152.55,691.55 152.55,692.45 120,725 120,815 100,835 100,910 127.24,937.24 X2.3
N$10: D7.+ R12.2 | length 62.4
  Top w6: D7.+ 408.7,1098.09 R12.2
N$11: D5.+ R6.1 | length 47.7
  Top w6: R6.1 160.3,1133.51 D5.+
N$18: D4.- U4.14 | length 505.2
  Top w6: D4.- v1(340,1140)
  Bottom w6: v1(340,1140) 415,1065 415,975 390,950 335,950 320,935 320,845 355.47,809.53 U4.14
N$19: R4.1 U4.20 | length 240.5
  Bottom w6: R4.1 405,821.3 443.7,821.3 490,775 490,745 484.53,739.53 U4.20
N$20: R3.1 U4.21 | length 211.6
  Bottom w6: R3.1 450,875 472.5,852.5 472.5,812.5 505,780 505,735 489.84,719.84 U4.21
N$24: R2.2 U4.7 | length 90.5
  Bottom w6: U4.7@290.79,660.79 U4.7
  Bottom w8: R2.2 256.3,626.3 U4.7@290.79,660.79
N$25: R1.2 U4.9 | length 80.9
  Bottom w6: R1.2 253.7,711.3 264.84,700.16 U4.9
RESET: C6.1 J1.13 J2.13 J3.3 K1.3 K1.4 R11.1 U3.29 | length 2246
  Top w6: J3.3 300,1600 475,1600 605,1470 605,1405 650,1360 J2.13 ; K1.4 292.13,1010 417.87,1010 K1.3 ; v1(435,1035) 425.87,1025.87 K1.3 ; U3.29 458.37,785.64 v1(493.86,821.14) 556.36,883.64 556.36,1024.39 575,1043.03 575,1160 603,1188 v1(603,1190) ; R11.1 476.69,1002.01 K1.3
  Bottom w6: J1.13 140,1440 140,1540 J3.3 ; v1(435,1035) 530,940 530,857.27 v1(493.86,821.14) 520,795 C6.1 ; v1(603,1190) 603,1303 J2.13
RXD: R3.2 R9.2 | length 50
  Bottom w6: R3.2 R9.2
TXD: R4.2 R10.2 | length 50
  Bottom w6: R4.2 R10.2
USB5V: C1.1 C2.1 D1.2 D6.1 F1.2 R2.1 U4.8 | length 587.9
  Top w12: D1.2 225,370 v1(235,380)
  Bottom w8: 280,680 280.47,680.47 U4.8
  Bottom w12: F1.2 180,435 v1(235,380)
  Bottom w15: R2.1 231.3,675 260,675 265,680 280,680
  Bottom w25: D6.1 D6.1@164.37,615.63 ; F1.2 210,485 C1.1 C2.1 190,580 190,590 ; R2.1 213.7,673.7 190,650 190,640 ; D6.1@164.37,615.63 165.63,615.63 190,640 ; D6.1@164.37,615.63 190,590 ; 190,590 190,640
USB_D: L1.1 U4.4 | length 211.3
  Bottom w6: L1.1 333.27,451.42 343.27,461.42 343.27,474.88 380.16,511.77 380.16,606.26 375.16,611.26 U4.4
USB_D+: L1.4 U4.3 | length 209.8
  Bottom w6: L1.4 356.73,451.42 356.73,466.42 394.84,504.53 U4.3
VCC: C8.1 C9.1 C11.1 C13.1 D6.2 J2.12 J3.6 J4.3 R11.2 R12.1 U1.2 U1.TER U2.3 U3.4 U3.6 U3.18 | length 2312.5
  Top w15: U3.6 170,763.19 v1(170,780) ; U3.4 222.27,800 v1(195,800) v1@190,800 ; v1(330,1075) 350,1095 R12.1 ; v1(365,985) 380,970 461.3,970 R11.2 ; U3.18 488.64,400 U2.3 ; v1(170,780) v1@190,800 ; v1(170,780) v1(170,800) v1@190,800
  Top w16: U3.6 220,713.19 220,609.8 274.69,555.11 333.53,555.11 U3.18
  Top w30: J3.6 468.94,1550 581,1437.94 581,1319 J2.12
  Bottom w6: U1.2 U1.2@280,1283.23
  Bottom w10: U1.TER 280,1025 v1(330,1075)
  Bottom w15: C9.1 183.7,811.3 v1(195,800) ; U1.TER 315,985 v1(365,985)
  Bottom w20: C8.1 246.3,806.3 265,825 265,883.7 C11.1 C13.1 253.7,993.7 U1.TER
  Bottom w25: U1.TER@280,1025 U1.2
  Bottom w35: U1.2@280,1283.23 335.27,1338.5 337.87,1338.5 J4.3 389.37,1424.37 435,1470 435,1535 J3.6
VDD: C3.1 R1.1 R5.2 R6.2 U4.5 U4.6 | length 976.1
  Top w6: 205.89,1055 210,1055 215,1060 205.89,1069.12 205.89,1070 ; R6.2@205.89,1093.18 R6.2
  Top w10: 205.89,1069.12 205.89,1060 ; 205.89,1070 R6.2@205.89,1093.18 ; v3(290,960) 266.77,960 205.89,1020.89 205.89,1055 205.89,1060 ; R5.2 298.7,1078.7 280,1060 215,1060 205.89,1060
  Top w16: v2(270,745) 290,725 v2(290,630)
  Bottom w8: U4.6 335.79,611.26 345.37,601.67 ; 345,600 345.37,600.37 355.47,610.47 U4.5
  Bottom w12: v2(270,745) 278.51,753.51 278.51,768.7 290,780.19 v3(290,960) ; 309.35,584.35 328.05,584.35 ; 318.7,575 328.05,584.35 ; 345.37,600.37 345.37,601.67 328.05,584.35
  Bottom w16: R1.1 256.3,758.7 v2(270,745) ; v2(290,630) 290,603.7 309.35,584.35 318.7,575
  Bottom w20: C3.1 318.7,575
VIN: C10.1 C12.1 J2.15 U1.3 | length 502.1
  Bottom w25: U1.3 U1.3@370,1275 ; U1.3@388.7,1293.7 399.19,1293.7 427.72,1293.7 C12.1 C10.1 C10.1@530,1303.7
  Bottom w35: U1.3@370,1275 U1.3@388.7,1293.7 ; 399.19,1293.7 399.99,1294.5 426.92,1294.5 427.72,1293.7 ; C10.1@530,1303.7 530,1430 J2.15
pads on no net: U4.1 U4.10 U4.11 U4.12 U4.15 U4.16 U4.17 U4.18 U4.19 U4.22 U4.24 USB1.A8 USB1.B8

## Polygon pours and split planes (outlines as drawn)
VCC on Bottom "Polygon_1_Net_VCC" (solid, remove dead copper, pour order 0): 129.5,745 129.5,770.21 174.79,815.5 240.21,815.5 245.5,810.21 245.5,789.79 240.21,784.5 220,784.5 215.21,784.5 175.5,744.79 175.5,724.79 170.21,719.5 165,719.5 139.79,719.5 129.5,729.79
GND on Bottom "Polygon_1_Net_GND" (solid, remove dead copper, pour order 2): -13,1713 708,1713 708,1625 708,-13 205,-13 -13,-13
GND on Top "Polygon_2_Net_GND" (solid, remove dead copper, pour order 1): -13,1713 708,1713 708,-13 -13,-13

## Keep-outs
Keep-Out Layer:
  the board outline again, w0

## Silkscreen, mask and mechanical layers (free items; w line width, h text height)
Top Overlay:
  lines w8: 520,1630 520,1635 ; 510,1635 525,1625 525,1645 510,1635
  text "1" at 510,1655 h29.75
  text "ICSP" at 185,1585 h29.75 r90
  text "TX" at 127.19,1529.68 h27.2 r90
  text "VIN" at 600,1515 h27.2 r90
  text "RX" at 127.19,1429.68 h27.2 r90
  text "GND" at 600,1410 h27.2 r90
  text "RST" at 127.19,1317.49 h27.2 r90
  text "RST" at 600,1315 h27.2 r90
  text "5V" at 600,1225 h27.2 r90
  text "GND" at 127.19,1217.49 h27.2 r90
  text "SCL" at 170,1215 h29.75
  text "SDA" at 265,1215 h29.75
  text "5V" at 375,1215 h29.75
  text "GND" at 450,1215 h29.75
  text "D2" at 127.19,1129.68 h27.2 r90
  text "A7" at 600,1125 h27.2 r90
  text "TX" at 150,1035 h29.75
  text "RX" at 245,1035 h29.75
  text "PWR" at 350,1035 h29.75
  text "DL" at 475,1035 h29.75
  text "D3" at 127.19,1029.68 h27.2 r90
  text "A6" at 600,1025 h27.2 r90
  text "D4" at 127.19,929.68 h27.2 r90
  text "RST" at 245,925 h27.2 r90
  text "A5" at 600,925 h27.2 r90
  text "D5" at 127.19,829.68 h27.2 r90
  text "A4" at 600,825 h27.2 r90
  text "D6" at 127.19,729.68 h27.2 r90
  text "A3" at 600,725 h27.2 r90
  text "D7" at 127.19,629.68 h27.2 r90
  text "A2" at 600,625 h27.2 r90
  text "D8" at 127.19,529.68 h27.2 r90
  text "A1" at 600,525 h27.2 r90
  text "D9" at 127.19,434.68 h27.2 r90
  text "A0" at 600,425 h27.2 r90
  text "D10" at 127.19,322.02 h27.2 r90
  text "REF" at 600,315 h27.2 r90
  text "D11" at 127.19,231.09 h27.2 r90
  text "3V3" at 600,210 h27.2 r90
  text "D12" at 127.19,122.02 h27.2 r90
  text "D13" at 600,110 h27.2 r90
Bottom Overlay:
  text "Seeeduino Nano v1.0" at 580,1050 h29.75 r90
Dimension:
  the board outline again, w0

## Dimensions
-10,1710 to 705,1710 on tFinish
-10,1710 to 5,-10 on tFinish

## Text inside footprints (layer, text, board x,y; h text height)
U4: tDocu "Z" at 388.94,686.38 h8.5; tDocu "X" at 341.69,725.75 h8.5; tDocu "Y" at 408.62,749.37 h8.5
USB1: Milling "Slot Drills with copper" at 358.03,136.89 h13.6 r180